# Altium PCB smart home2.PcbDoc
Units mm, origin at the board's own origin, x right, y up, seen from the top; angles counter-clockwise.
Board outline 151 x 86.38 mm, 2 copper layers (Top Layer, Bottom Layer); 24 components, 23 nets, 63 pads, 0 vias.
Unrouted connection lines stored in the file: 10.
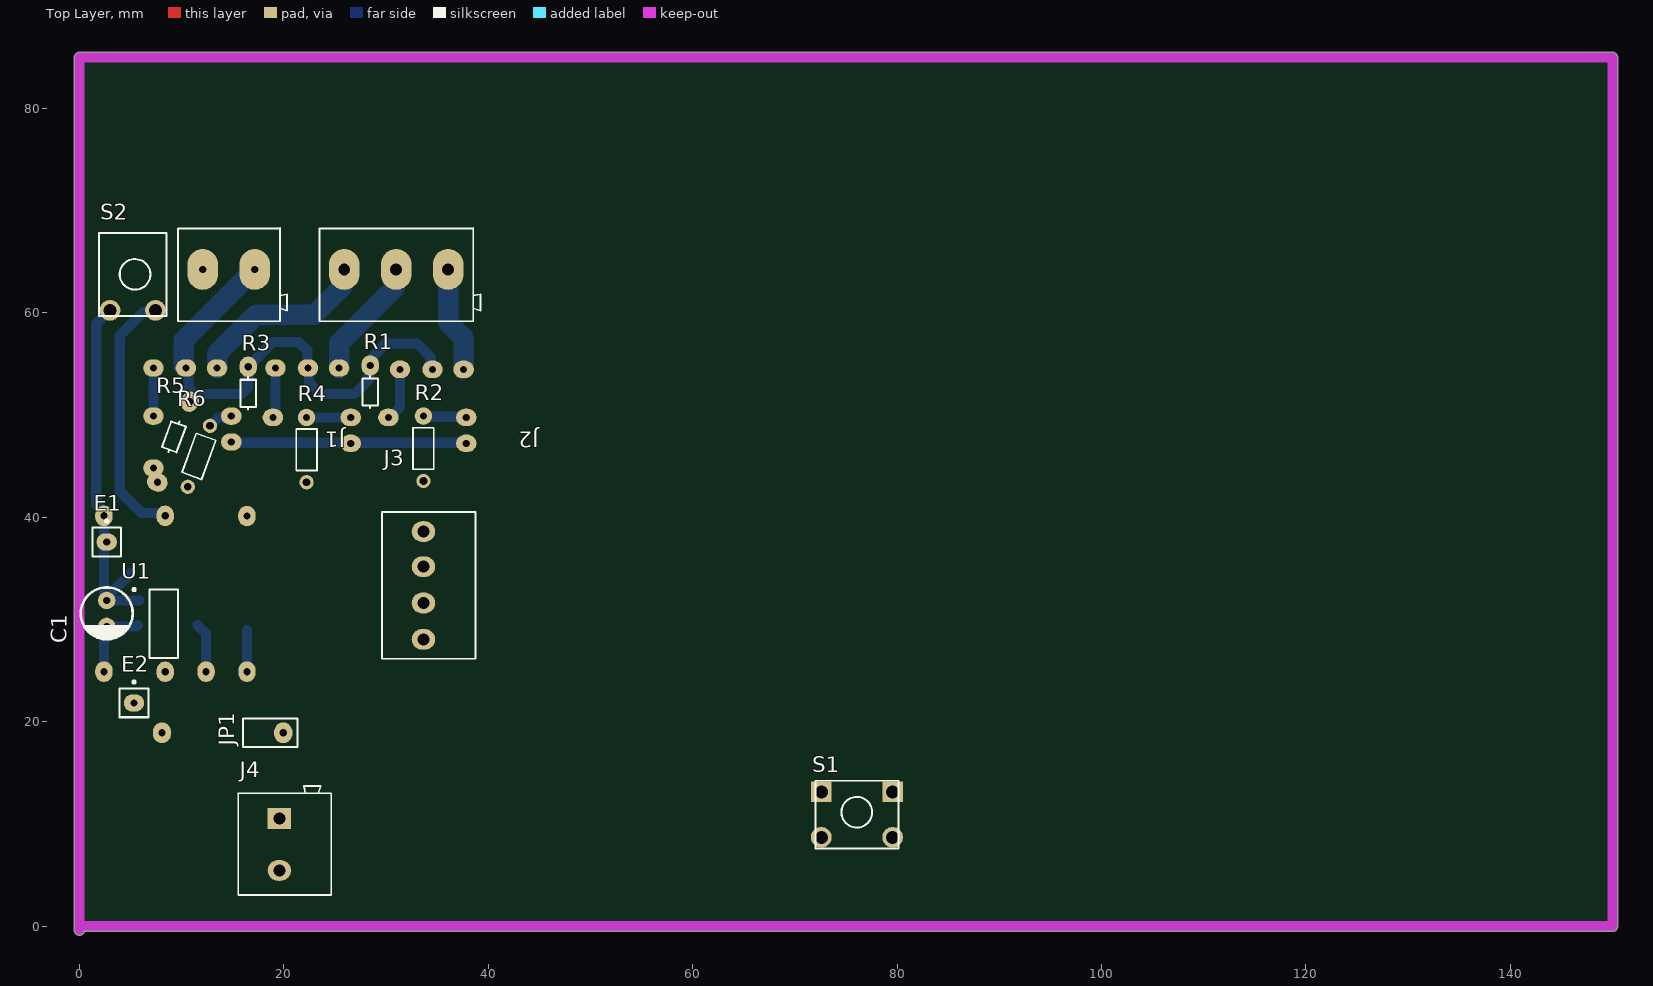
[diagram p0: Top Layer view]
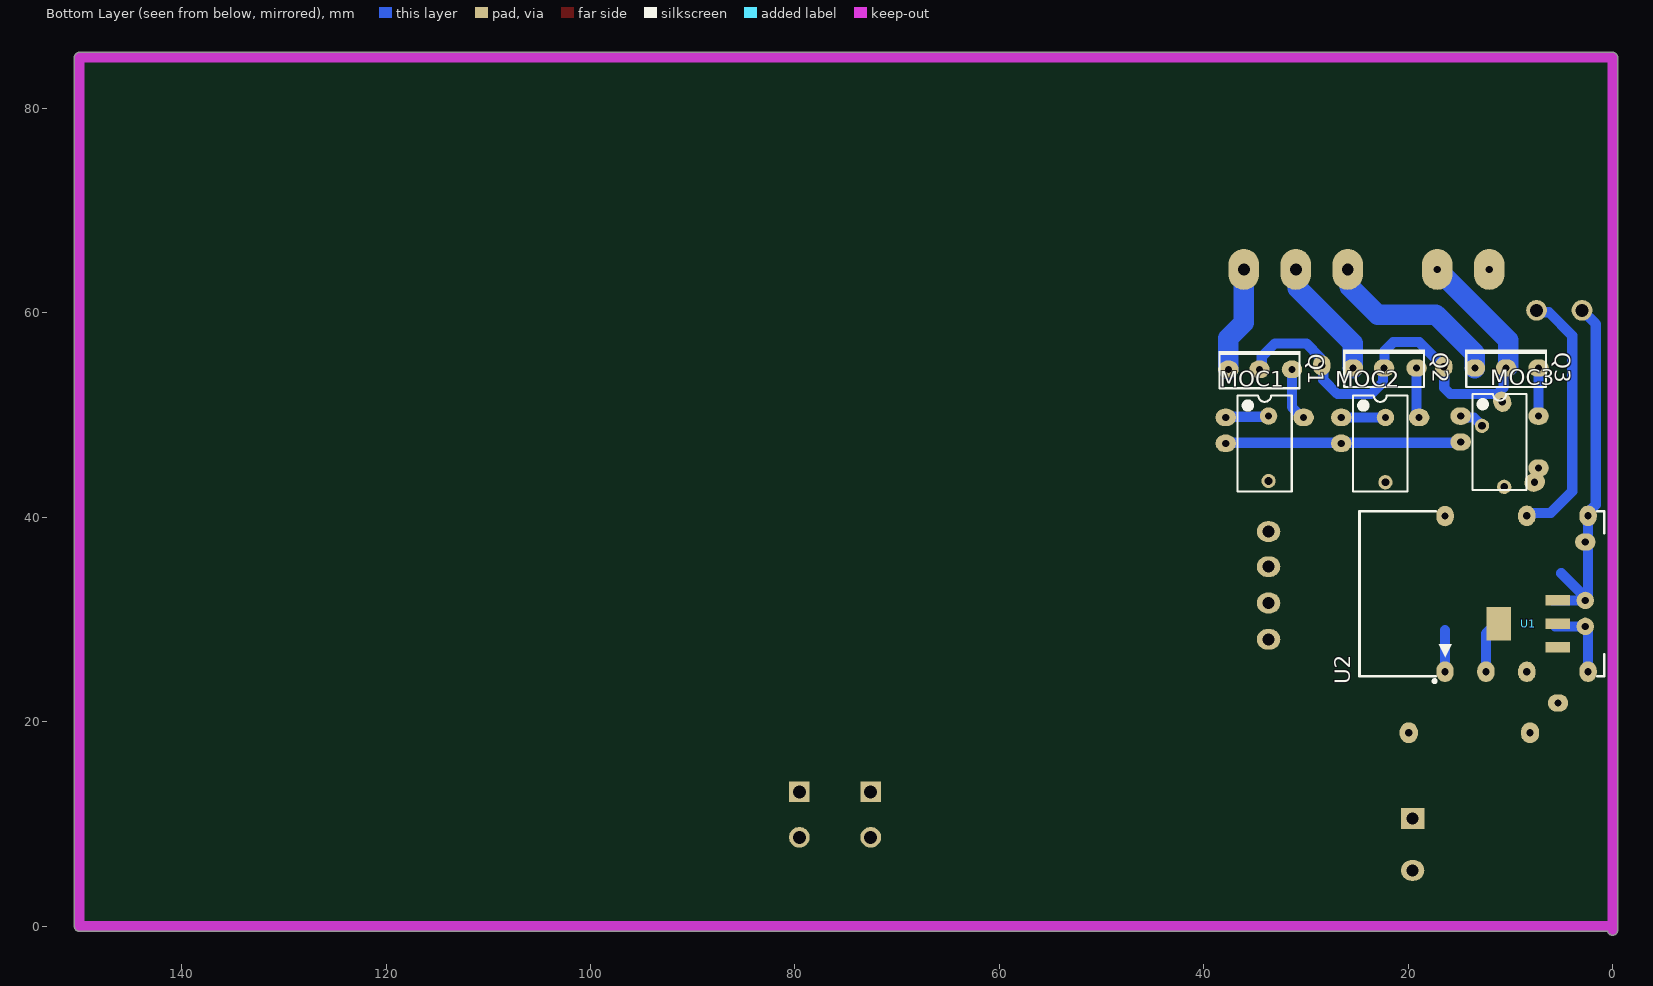
[diagram p1: Bottom Layer view, seen from below]
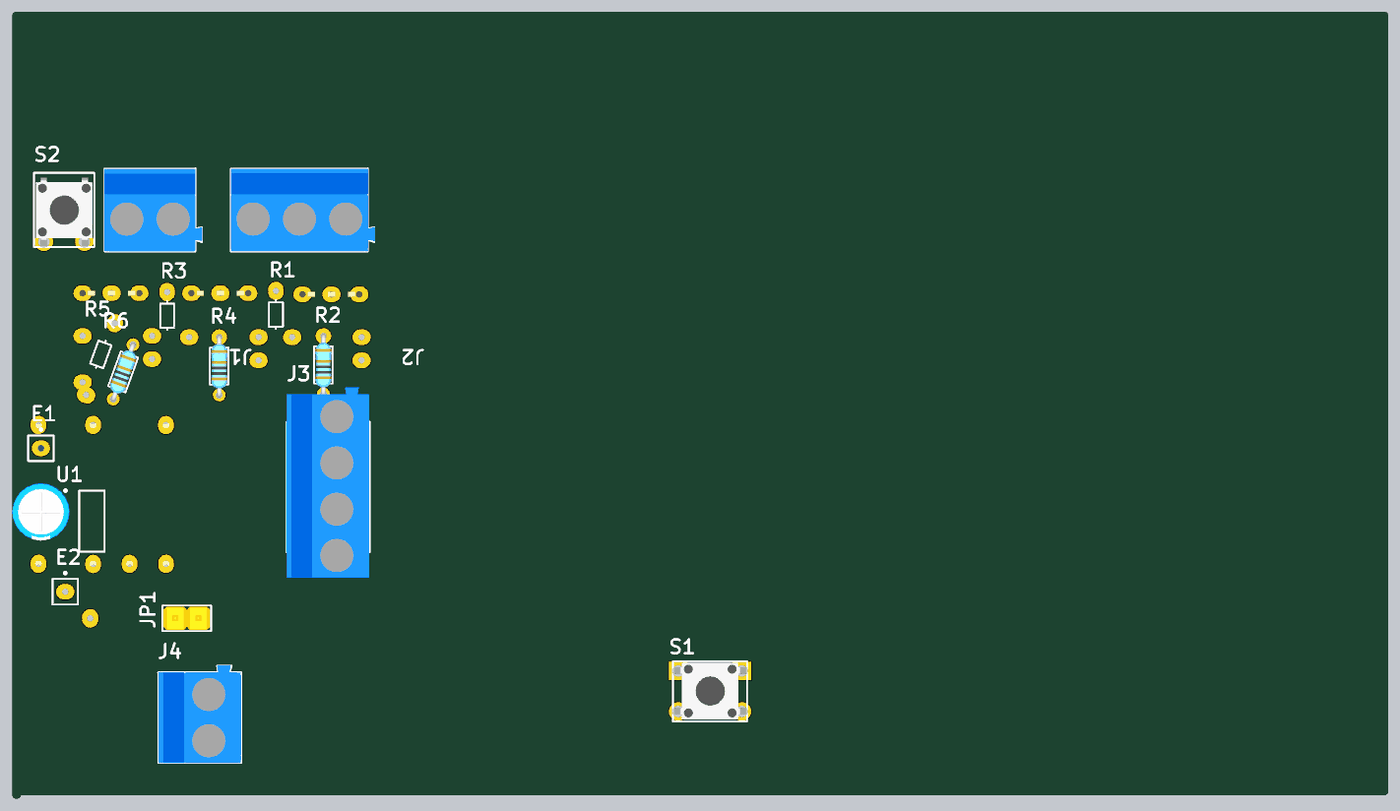
[diagram p2: 3D render of the assembled board from above, using the file's embedded part models]
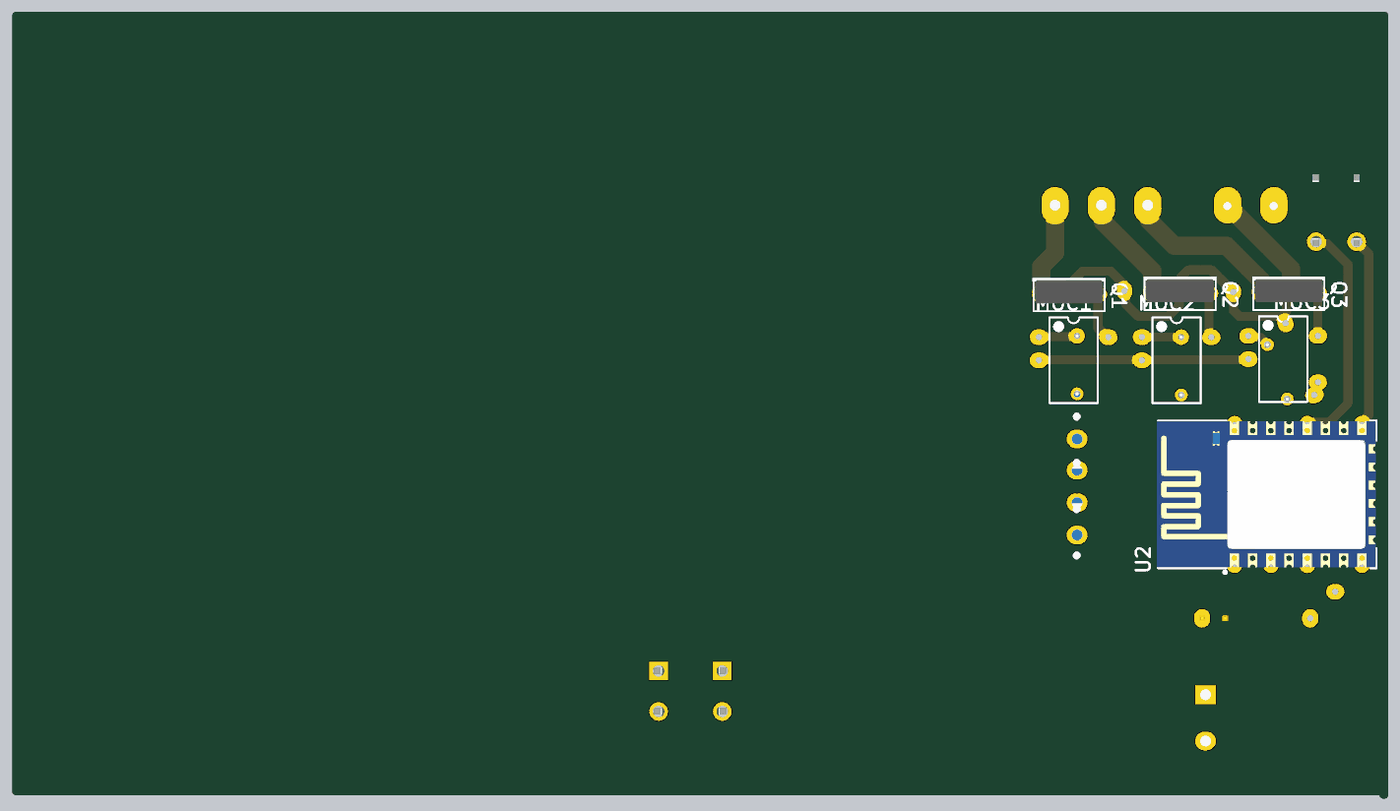
[diagram p3: 3D render of the assembled board from below, using the file's embedded part models]

## Layer stack, top to bottom
Top Solder: solder mask 0.0102, Solder Resist, Dk 3.5
Top Layer: signal copper 0.0356
Dielectric 1: dielectric 0.32, FR-4, Dk 4.8
Bottom Layer: signal copper 0.0356
Bottom Solder: solder mask 0.0102, Solder Resist, Dk 3.5

## Board outline
-0.5,-0.381 -0.5,85 cw(c0,85) 0,85.5 150,85.5 cw(c150,85) 150.5,85 150.5,0 cw(c150,0) 150,-0.5 0.486,-0.5 cw(c0,-0.381)

## Design rules (kind name [scope] priority, off if disabled: settings)
Clearance Clearance_1 [InPolygon] p1: gap=0.8 ignorepadtopadclearanceinfootprint=FALSE
Clearance [All] p2: gap=0.254 ignorepadtopadclearanceinfootprint=FALSE except(0: Arc-Hole Track-Hole SMDPad-Hole THPad-Hole Via-Hole Fill-Hole Poly-Hole Region-Hole Text-Hole)
PolygonConnect [All] p1: connectstyle=Relief reliefconductorwidth=0.254 reliefentries=4 polygonreliefangle="90 Angle" airgapwidth=0.254
RoomDefinition "smart home2" [InComponentClass('smart home2')] p1: confinementstyle=ConfineIn formatcopy=TRUE lockcomponents=FALSE outline 144.907,-4.953 247.904,-4.953 247.904,23.114 144.907,23.114
RoutingLayers [All] p1: top layer_v5=FALSE bottom layer_v5=TRUE
RoutingVias [All] p1: holewidth=0.711 width=2.5 viastyle="Through Hole" minholewidth=0.711 minwidth=1.27 maxholewidth=0.711 maxwidth=2
SolderMaskExpansion [All] p1: expansion=0.102 istentingtop=FALSE
Width [All] p1: maxlimit=3 minlimit=0.5 preferedwidth=1
29 further rules are at their usual default settings.

## Components (designator, comment, footprint, x,y, rotation, side; value= is the part's Value field where it differs from the comment)
C1 "=Value" ELEC-CAP-RAD10-20 2.667,30.607 r90 top
E1 "Antenna" PIN1 2.667,37.592 r0 top
E2 "Antenna" PIN1 5.334,21.844 r0 top
J1 "TBlock-2" "KF300-2 PIN"#1 17.145,64.262 r270 top
J2 "TBlock-3" "KF300-3 PIN" 36.068,64.262 r270 top
J3 "TBlock-4" "KF300-4 PIN" 33.655,41.021 r0 top
J4 "TBlock-2" "KF300-2 PIN"#2 19.558,10.541 r0 top
JP1 "Jumper" "Header 2X1" 18.669,18.923 r180 top
MOC1 "MOC3021-3" DIP-6#1 34.036,47.244 r180 bottom
MOC2 "MOC3021-3" DIP-6#1 22.733,47.244 r180 bottom
MOC3 "MOC3021-3" DIP-6#2 11.049,47.371 r180 bottom
Q1 "MODEL" SOT32 34.544,54.483 r180 bottom
Q2 "MODEL" SOT32 22.352,54.61 r180 bottom
Q3 "MODEL" SOT32 10.414,54.61 r180 bottom
R1 "Res2" Res50#1 28.448,53.467 r90 top
R2 "10K" Res-(1/4)#1 33.655,46.736 r90 top
R3 "Res2" Res50#1 16.51,53.34 r90 top
R4 "10K" Res-(1/4)#1 22.225,46.609 r90 top
R5 "Res2" Res50#2 9.652,49.022 r70 top
R6 "10K" Res-(1/4)#2 11.684,45.974 r70 top
S1 "PUSH BUTTON DOUBLE" "PUSH BUTTON"#1 76.073,10.922 r0 top
S2 "PUSH BUTTON DOUBLE" "PUSH BUTTON"#2 5.207,63.754 r270 top
U1 "LM1117MP-3.3" MP04A_N 8.255,29.591 r0 top
U2 "ESP_12_E" ESP_12_E 16.389,24.528 r90 bottom

## Footprints (in the part's own frame and the unit in brackets; to place one, negate y for a bottom-side part, rotate by r counter-clockwise, add the part's x,y. Pads: shape width x height; smd on the part's side, far side on the other; paste and mask are expansions set on the pad)
DIP-6#1 [mm] "DIP; 6 Leads; Row Spacing 7.62 mm; Pitch 2.54 mm"
  oval 2x1.7 hole 0.7: 1(-3.81,2.54) 2(-3.81,0) 6(3.81,2.54)
  silkscreen extent -2.65,-4.7 2.65,4.7
DIP-6#2 [mm] "DIP; 6 Leads; Row Spacing 7.62 mm; Pitch 2.54 mm"
  oval 2x1.7 hole 0.7: 1(-3.81,2.54) 2(-3.81,0) 4(3.81,-2.54) 6(3.81,2.54)
  silkscreen extent -2.65,-4.7 2.65,4.7
ELEC-CAP-RAD10-20 [mm]
  round 1.7 hole 0.7: 1(-1.27,0) 2(1.27,0)
  silkscreen extent -2.54,-2.54 2.54,2.54, body extent -3.15,-3.15 3.15,3.15, height 10.26
ESP_12_E [mm] "ESP-12 Wi-Fi Module by AI-Thinker"
  oval 2x1.7 hole 0.7: 1(0.375,0) 3(0.375,-4) 5(0.364,-8) 8(0.375,-14) 15(15.625,-14) 18(15.625,-8) 22(15.604,-0.006)
  silkscreen extent -0.7,-15.57 16.08,8.37, body extent 0,-15.49 16,8.51, height 2.75
"Header 2X1" [mil]
  oval 70x80 hole 27.56: 1(-50,0) 2(417.32,0)
  silkscreen extent -105,-55 105,55, body extent -100,-50 100,50, height 374
"KF300-2 PIN"#1 [mm]
  oval 4x3 hole 0.7: 1(0,0) 2(0,-5.08)
  silkscreen extent -4.06,-7.49 5.08,3.18, body extent -3.99,-7.5 5.08,3.24, height 12.52
"KF300-2 PIN"#2 [mm]
  rect 2.286x2.032 hole 1.168: 1(0,0)
  oval 2.286x2.032 hole 1.168: 2(0,-5.08)
  silkscreen extent -4.06,-7.49 5.08,3.17, body extent -3.99,-7.5 5.08,3.24, height 12.52
"KF300-3 PIN" [mm]
  oval 4x3 hole 1.168: 1(0,0) 2(0,-5.08) 3(0,-10.16)
  silkscreen extent -4.06,-12.57 5.08,3.18, body extent -4,-12.57 5.07,3.25, height 12.78
"KF300-4 PIN" [mil]
  oval 90x80 hole 46: 1(0,-95) 2(0,-230) 3(0,-370) 4(0,-510)
  silkscreen extent -159,-585 200,-20, body extent -159,-695 198,128, height 493
MP04A_N [mm] "SOT223, 4-Leads, Body 6.5x3.5mm, Pitch 2.3mm, Lead Span 7mm, IPC Medium Density"
  rect 2.4x1 smd far side: 1(-2.9,2.3) 2(-2.9,0) 3(-2.9,-2.3)
  rect 2.4x3.3 smd far side: 4(2.9,0)
  silkscreen extent -3.02,-3.35 1.4,3.47, body extent -1.85,-3.35 1.85,3.35, height 1.8
PIN1 [mm] "Generic Antenna; 1 Lead"
  oval 2x1.7 hole 0.7: 1(0,0)
  silkscreen extent -1.4,-1.4 1.4,2.17
"PUSH BUTTON"#1 [mil]
  rect 80x80 hole 50: 1(-137.5,87.5) 2(137.5,87.5)
  round 80 hole 50: 3(-137.5,-87.5) 4(137.5,-87.5)
  silkscreen extent -160,-130 160,130, body extent -155,-121 157,123, height 205
"PUSH BUTTON"#2 [mil]
  round 80 hole 50: 2(137.5,87.5) 4(137.5,-87.5)
  silkscreen extent -160,-130 160,130, body extent -155,-121 157,123, height 205
Res50#1 [mm] "50mm Pin Spacing"
  oval 2x1.7 hole 0.7: 2(1.397,0)
  silkscreen extent -2.77,-0.76 0.38,0.76
Res50#2 [mm] "50mm Pin Spacing"
  oval 1.778x2.032 hole 0.7: 1(-5.946,-0.002)
  oval 2x1.7 hole 0.7: 2(2.539,-0.292)
  silkscreen extent -2.77,-0.76 0.38,0.76
Res-(1/4)#1 [mm]
  round 1.397 hole 0.762: 1(-3.175,0)
  round 1.7 hole 0.7: 2(3.175,0)
  silkscreen extent -2.03,-1.02 2.03,1.02, body extent -3.43,-0.93 3.43,0.91, height 2.92
Res-(1/4)#2 [mm]
  round 1.397 hole 0.762: 1(-3.175,0) 2(3.175,0)
  silkscreen extent -2.03,-1.02 2.03,1.02, body extent -3.43,-0.93 3.43,0.91, height 2.92
SOT32 [mm] "SIP with Mounting Hole; 3 Leads; Body 10.7 x 7.6 x 2.6 mm (typ); Pitch 2.2 mm"
  oval 2x1.7 hole 0.7: 1(-3.048,0) 2(0,0) 3(3.175,0)
  silkscreen extent -4,-1.85 4,1.8, body extent -3.8,-1 3.8,1.55, height 15.19

## Part data
C1: library part "Capacitor Electrolytic", "Electrolytic Capacitor"
E1 E2: "Generic Antenna", LatestRevisionDate=17-Jul-2002, LatestRevisionNote="Re-released for DXP Platform.", PackageReference=PIN1, Published=24-Mar-1999, Publisher="Altium Limited"
MOC1 MOC2 MOC3: "Opto-Triac", Designer="Seyed Mohsen Ghasemian", E-mail=picpars@gmail.com, LatestRevisionDate=17-11-2011, Published=17-11-2011, Publisher=www.picpars.com, WEB=www.picpars.com
Q1 Q2 Q3: library part BD139, "NPN Bipolar Transistor"
R1 R3 R5: "Resistor", LatestRevisionDate=17-Jul-2002, LatestRevisionNote="Re-released for DXP Platform.", PackageDescription="Axial Device, Thru-Hole; 2 Leads; 0.4 in Pin Spacing", PackageReference=AXIAL-0.4, Published=8-Jun-2000, Publisher="Altium Limited"
R2 R4 R6: library part Resistor, "Resistor", Power="1/4 W", Tolerance=5%
S1 S2: "Switch"
U1: "800mA Low-Dropout Linear Regulator", DigiKeyPartNumber=LM1117MP-3.3CT-ND, Manufacturer="National Semiconductor", PackageTopMarking=XYTT*N05A, PowerWise=N, Code_IPC=SOT223-4, Code_JEDEC=TO-261-AA, ComponentLink1Description="LM1117 Datasheet", ComponentLink1URL=http://www.national.com/ds/LM/LM1117.pdf, ComponentLink2Description="LM1117 Web Page", ComponentLink2URL=http://www.national.com/pf/LM/LM1117.html, ComponentLink3Description="MP04A Package Page", ComponentLink3URL=http://www.national.com/packaging/folders/mp04a.html, CompType="LDO IC", DatasheetVersion=Apr-2006, PackageDescription="Molded SOT-223, 6.50 x 3.56 x 1.6mm Body, 4 Lead, 2.3mm Pitch", PackageReference=MP04A, PackageVersion="revB, Apr-2003", PartNumber=LM1117MP-3.3, PinCount=4, Published=4-Dec-2008, Publisher="Altium Limited", RoHS=O
U2: "ESP-12 Wi-Fi Module by AI-Thinker", IC=ESP8266-EX, Vendor=Ai-thinker

## Nets (pads, with @x,y where several pads share a name; then routed paths per layer and width w, separated by ;. In a path a pad name is that pad's centre, name@x,y a point inside that pad or via, vN(x,y) a via of type N, cw(c..) or ccw(c..) an arc to the next point about the centre after c; other vN are vias at no path point)
btn: S2.2 U2.18 | length 25.2
  Bottom Layer w1: S2.2 7.232,60.064 6.216,60.064 3.937,57.785 3.937,42.545 6.045,40.437 8.105,40.437 U2.18
faz: J1.1 Q1.2 Q2.2 Q3.2 R1.2 R3.2 R5.2 | length 50.3
  Bottom Layer w1: Q3.2 10.678,54.346 10.678,52.656 11.264,52.07 15.886,52.07 16.472,52.656 16.472,54.699 R3.2 18.923,57.15 21.463,57.15 22.314,56.299 22.314,54.933 Q2.2@22.48,54.767 ; Q2.2 22.454,54.508 22.454,53.238 23.622,52.07 26.924,52.07 28.314,53.46 28.314,54.829 28.582,55.097 28.582,55.633 29.972,57.023 33.02,57.023 34.315,55.728 34.315,54.712 Q1.2
  Bottom Layer w2: Q3.2@10.198,54.801 10.198,57.315 J1.1
GND: C1.2 E1.1 J3.3 J4.1 JP1.1 JP1.2 MOC1.2 MOC2.2 MOC3.2 S1.4 S2.4 U1.1 U2.15 | length 59.2
  Bottom Layer w1: U2.15 2.389,40.492 1.651,41.23 1.651,58.928 S2.4 ; U2.15@2.413,40.132 2.413,32.131 C1.2 ; 5.021,34.544 2.667,32.19 C1.2 ; U1.1@5.842,31.877 C1.2 ; MOC3.2 14.922,47.307 37.782,47.307 MOC1.2
NetJ2_1: J2.1 Q1.1 | length 10.4
  Bottom Layer w2: J2.1 36.068,59.055 37.592,57.531 Q1.1
NetJ2_2: J2.2 Q2.1 | length 12
  Bottom Layer w2: Q2.1 25.4,57.023 30.797,62.42 30.797,64.071 J2.2
NetJ2_3: J2.3 Q3.1 | length 18.2
  Bottom Layer w2: Q3.1 13.462,56.007 17.272,59.817 22.987,59.817 25.717,62.547 25.717,64.071 J2.3
NetMOC1_1: MOC1.1 R2.2 | length 4.4
  Bottom Layer w1: R2.2 33.718,49.847 37.782,49.847 MOC1.1 ; MOC1.1@37.585,49.65 MOC1.1@37.719,49.784
NetMOC1_4: 
NetMOC1_6: MOC1.6 Q1.3 | length 4.9
  Bottom Layer w1: MOC1.6@30.48,49.911 31.369,50.8 Q1.3
NetMOC2_1: MOC2.1 R4.2 | length 4.5
  Bottom Layer w1: R4.2 MOC2.1 MOC2.1@26.409,49.65
NetMOC2_4: 
NetMOC2_6: MOC2.6 Q2.3 | length 4.8
  Bottom Layer w1: MOC2.6@19.05,49.911 19.177,50.038 Q2.3
NetMOC3_1: MOC3.1 R6.2 | length 2.5
  Bottom Layer w1: R6.2 13.589,49.777 14.725,49.777 MOC3.1
NetMOC3_4: MOC3.4 R5.1
NetMOC3_6: MOC3.6 Q3.3 | length 4.7
  Bottom Layer w1: MOC3.6@7.239,49.917 Q3.3
o1: R2.1 U2.22
o2: R4.1
o3: R6.1
out: U2.5
rst: S1.2 U2.1 | length 4.3
  Top Layer w0.7: U2.1 U2.1@16.648,24.903
  Bottom Layer w1: U2.1 16.389,28.95
s: J4.2
vDD: E2.1 U1.3
vesp: C1.1 U1.2 U1.4 U2.3 U2.8 | length 12.6
  Bottom Layer w1: U2.8 2.389,28.87 2.667,29.148 C1.1 5.609,29.337 U1.2@5.736,29.464 ; U1.4@11.536,29.464 12.389,28.611 U2.3
pads on no net: J1.2 J3.1 J3.2 J3.4 S1.1 S1.3

## Keep-outs
Keep-Out Layer:
  lines w1: 0,-0.381 0,85 150,85 150,0 0,0

## Text inside footprints (layer, text, board x,y; h text height)
U2: Mechanical 13 "CUTOUT POLYGON" at 23.755,24.655 h0.25 r270; Mechanical 13 "ANTENNA AREA" at 24.263,24.655 h0.25 r270